# Altium PCB Nutap_Adpt2.PcbDoc
Units mm, origin at the board's own origin, x right, y up, seen from the top; angles counter-clockwise.
Board outline 39.5 x 15 mm, 2 copper layers (Top Layer, Bottom Layer); 24 components, 12 nets, 68 pads, 5 vias.
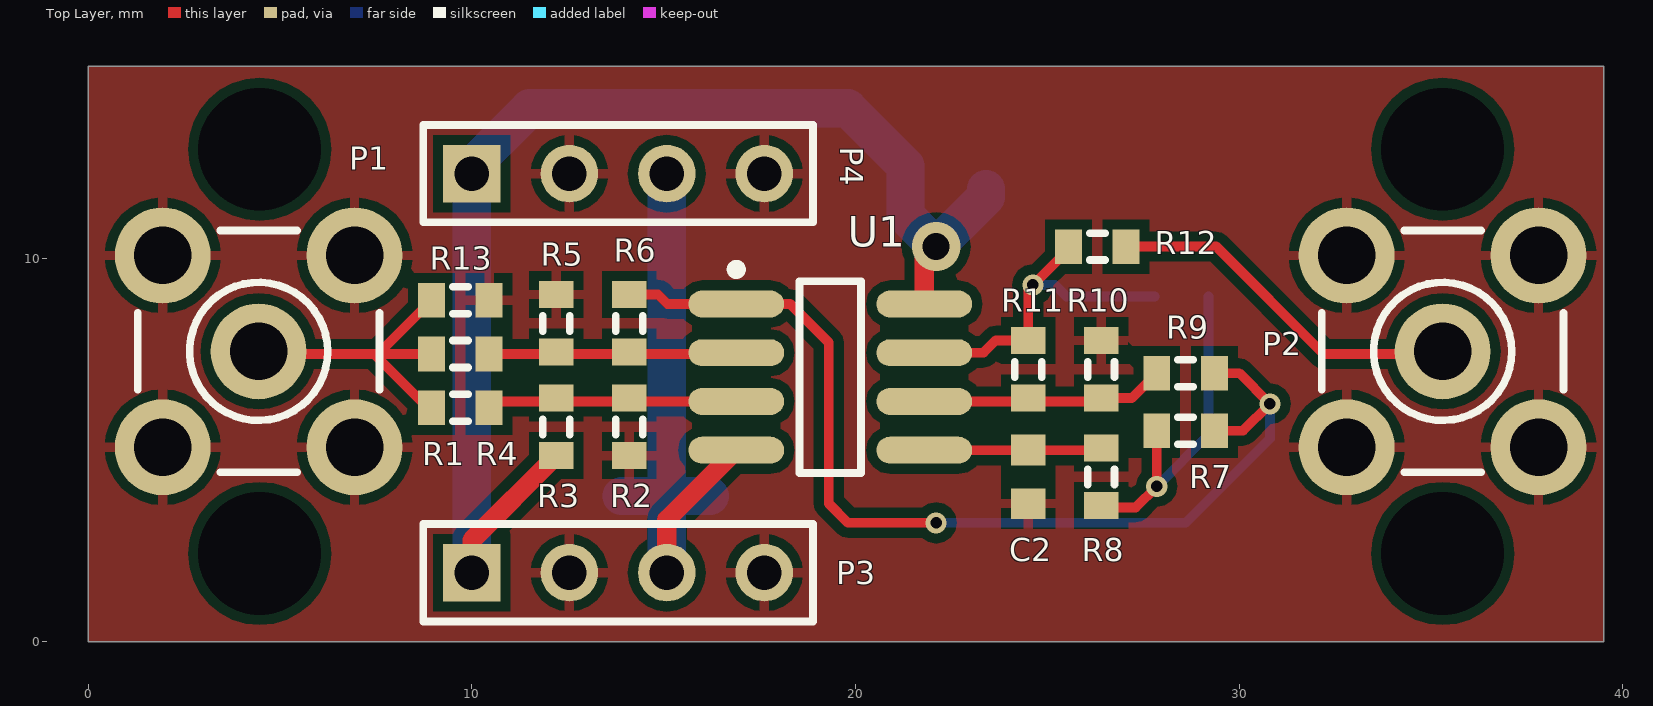
[diagram p0: Top Layer view]
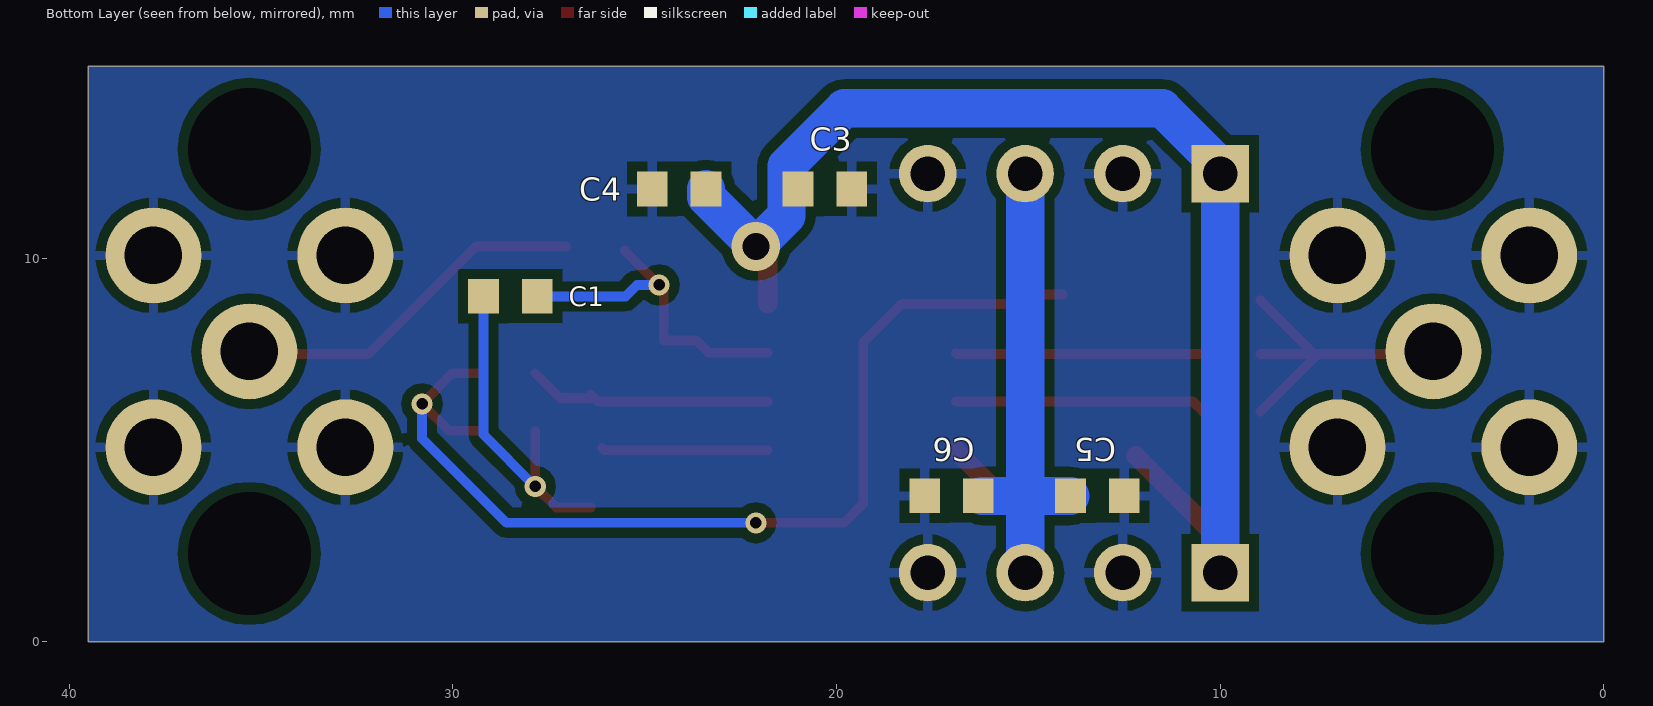
[diagram p1: Bottom Layer view, seen from below]

## Layer stack, top to bottom
Top Layer: signal copper 0.0356
Dielectric: dielectric 0.32, FR-4, Dk 4.8
Bottom Layer: signal copper 0.0356

## Board outline
0,0 0,15 39.5,15 39.5,0

## Design rules (kind name [scope] priority, off if disabled: settings)
Clearance [All] p1: gap=0.254
HoleSize [All] p1: absolutevalues=TRUE maxlimit=3.5 minlimit=0.025 maxpercent=80.000 minpercent=20.000
MinimumSolderMaskSliver MinimumSolderMaskSliver_1 [InComponent('U1')] p1: minsoldermaskwidth=0.05
MinimumSolderMaskSliver [All] p2: minsoldermaskwidth=0.254
PolygonConnect [All] p1: connectstyle=Relief reliefconductorwidth=0.254 reliefentries=4 polygonreliefangle="90 Angle"
RoutingVias [All] p1: holewidth=0.711 width=1.27 viastyle="Through Hole" minholewidth=0.3 minwidth=0.5 maxholewidth=0.711 maxwidth=1.27
SilkscreenOverComponentPads SilkscreenOverComponentPads_1 [All vs (HasFootprint('J1-0603')   OR HasFootprint('POT4MM-2'))] p1: minsilkscreentomaskgap=0.02
SilkscreenOverComponentPads [All] p2: minsilkscreentomaskgap=0.254
SolderMaskExpansion SolderMaskExpansion_1 [InComponent('U1')] p1: expansion=0.05
SolderMaskExpansion [All] p2: expansion=0.102
Width Width_1 [(InNet('-3V') OR InNet('+3V') OR InNet('GND'))] p1: maxlimit=1 minlimit=0.5 preferedwidth=1 toplayer_prefwidth=0.5 bottomlayer_minwidth=1 minimp=50.000000 maximp=50.000000 favimp=50.000000
Width [All] p2: maxlimit=0.254 minlimit=0.254 preferedwidth=0.254
25 further rules are at their usual default settings.

## Components (designator, comment, footprint, x,y, rotation, side; value= is the part's Value field where it differs from the comment)
C1 "Cap" 1608[0603] 28.5,9 r180 bottom
C2 "Cap" 1608[0603] 24.5,4.3 r270 top
C3 "Cap Pol" 1608[0603] 20.3,11.8 r180 bottom
C4 "Cap" 1608[0603] 24.1,11.8 r0 bottom
C5 "Cap Pol" 1608[0603] 13.2,3.8 r0 bottom
C6 "Cap" 1608[0603] 17,3.8 r0 bottom
P1 "SMA" SMB_V-RJ45 4.442,7.568 r0 top
P2 "SMA" SMB_V-RJ45 35.3,7.568 r0 top
P3 "Header 4" HDR1X4 10,1.8 r0 top
P4 "Header 4" HDR1X4 10,12.2 r0 top
R1 "Res3" J1-0603 9.7,6.1 r0 top
R2 "Res3" J1-0603 14.1,5.6 r90 top
R3 "Res3" J1-0603 12.2,5.6 r270 top
R4 "Res3" J1-0603 9.7,7.5 r0 top
R5 "Res3" J1-0603 12.2,8.3 r90 top
R6 "Res3" J1-0603 14.1,8.3 r90 top
R7 "Res3" J1-0603 28.6,5.5 r180 top
R8 "Res3" J1-0603 26.4,4.3 r90 top
R9 "Res3" J1-0603 28.6,7 r180 top
R10 "Res3" J1-0603 26.4,7.1 r270 top
R11 "Res3" J1-0603 24.5,7.1 r90 top
R12 "Res3" J1-0603 26.3,10.3 r0 top
R13 "Res3" J1-0603 9.7,8.9 r0 top
U1 "THS4062" SO-8_M 19.34,6.898 r0 top

## Footprints (in the part's own frame and the unit in brackets; to place one, negate y for a bottom-side part, rotate by r counter-clockwise, add the part's x,y. Pads: shape width x height; smd on the part's side, far side on the other; paste and mask are expansions set on the pad)
1608[0603] [mm] "Chip Capacitor, Body 1.6x0.8mm, IPC High Density"
  rect 0.8x0.9 smd: 1(-0.7,0) 2(0.7,0)
  body extent -0.87,-0.48 0.87,0.48, height 1.3
HDR1X4 [mm] "Connector; Header; 4 Position"
  rect 1.5x1.5 hole 0.9: 1(0,0)
  round 1.5 hole 0.9: 2(2.54,0) 3(5.08,0) 4(7.62,0)
  silkscreen extent -1.27,-1.27 8.89,1.27
J1-0603 [mm] "Chip Resistor, Body 1.6x0.8mm, IPC High Density"
  rect 0.7x0.9 smd: 1(-0.75,0) 2(0.75,0)
  silkscreen extent -0.2,-0.35 0.2,0.35, body extent -0.85,-0.48 0.85,0.48, height 0.9
SMB_V-RJ45 [mm] "Connector; SMB Straight"
  round 2.5 hole 1.5: 1(0,0) 2(-2.5,-2.5) 2(-2.5,2.5) 2(2.5,-2.5) 2(2.5,2.5)
  silkscreen extent -3.15,-3.15 3.15,3.15
SO-8_M [mm] "SOIC, 8-Leads, Body 4.9x3.9mm, Pitch 1.27mm, IPC Low Density"
  oval 2.5x0.7 smd: 1(-2.45,1.905) 2(-2.45,0.635) 3(-2.45,-0.635) 4(-2.45,-1.905) 5(2.45,-1.905) 6(2.45,-0.635) 7(2.45,0.635) 8(2.45,1.905)
  silkscreen extent -2.57,-2.5 0.8,2.93, body extent -2,-2.5 2,2.5, height 1.75

## Part data
C1 C2 C4 C6: library part "Cap Semi", "Capacitor (Semiconductor SIM Model)"
C3 C5: library part "Cap Pol3", "Polarized Capacitor (Surface Mount)"
P1 P2: library part SMB, "SMB Straight Connector"
P3 P4: "Header, 4-Pin"
R1 R2 R3 R4 R5 R6 R7 R8 R9 R10 R11 R12 R13: "Resistor"
U1: library part AD8002AR, "Dual 600MHz, 50mW Current Feedback Amplifier"

## Free pads (board coordinates)
  round 1.524 hole 3.2 unplated paste+0 mask+0.102: T1(4.467,12.837) T1(35.3,12.837) T2(4.467,2.3)
  round 1.524 hole 3.2 unplated: T3(35.3,2.3)

## Via types
v1: diameter 0.55, hole 0.3, Top Layer to Bottom Layer, 4 vias
v2: diameter 1.27, hole 0.7, Top Layer to Bottom Layer, 1 vias

## Nets (pads, with @x,y where several pads share a name; then routed paths per layer and width w, separated by ;. In a path a pad name is that pad's centre, name@x,y a point inside that pad or via, vN(x,y) a via of type N, cw(c..) or ccw(c..) an arc to the next point about the centre after c; other vN are vias at no path point)
+3V: C3.1 C4.1 P3.1 P4.1 R3.2 U1.8 | length 33
  Top Layer w0.5: P3.1 10,2.65 R3.2 ; U1.8 21.79,9.99 v2(22.1,10.3)
  Bottom Layer w1: P3.1 P4.1@10,12 ; P4.1 10,12.4 11.5,13.9 19.8,13.9 21.3,12.4 21.3,11.1 v2(22.1,10.3) 23.4,11.6 C4.1
-3V: C5.2 C6.1 P3.3 P4.3 U1.4 | length 16.6
  Top Layer w0.5: P3.3 15.08,3.183 U1.4
  Bottom Layer w1: C5.2 15.08,3.8 ; P3.3 15.08,3.8 ; P4.3 15.08,3.8 ; C6.1@16.2,3.8 15.08,3.8
GND: C2.2 C3.2 C4.2 C5.1 C6.2 P1.2 P2.2 P3.2 P3.4 P4.2 P4.4 R2.1 R5.2 R10.1 R13.2
NetC1_1: C1.1 R7.2 R8.1 | length 8.6
  Top Layer w0.254: R8.1@26.4,3.5 27.3,3.5 v1(27.85,4.05) R7.2
  Bottom Layer w0.254: v1(27.85,4.05) 29.2,5.4 C1.1
NetC1_2: C1.2 R11.2 R12.1 U1.7 | length 8.9
  Top Layer w0.254: U1.7 23.333,7.533 23.65,7.85 R11.2 24.5,9.181 v1(24.619,9.3) R12.1@25.519,10.2
  Bottom Layer w0.254: v1(24.619,9.3) 25.2,9.3 25.5,9 C1.2
NetC2_1: C2.1 R8.2 U1.5 | length 4.3
  Top Layer w0.254: U1.5 26.043,4.993 R8.2@26.1,5.05
NetP1_1: P1.1 R1.1 R4.1 R13.1 | length 9.4
  Top Layer w0.254: P1.1@4.4,7.5 7.45,7.5 ; 6.8,7.5 7.55,7.5 ; R1.1@8.95,6 7.45,7.5 ; R4.1 7.55,7.5 ; R13.1 7.55,7.5 ; 7.45,7.5 7.55,7.5
NetP2_1: P2.1 R12.2 | length 9.6
  Top Layer w0.254: R12.2 29.4,10.3 32.2,7.5 34.9,7.5 P2.1@35.3,7.1
NetR1_2: R1.2 R2.2 R3.1 U1.3 | length 6.5
  Top Layer w0.254: R1.2@10.45,6 10.713,6.263 U1.3
NetR4_2: R4.2 R5.1 R6.1 U1.2 | length 6.5
  Top Layer w0.254: R4.2 16.857,7.5 U1.2
NetR6_2: R6.2 R7.1 R9.1 U1.1 | length 27
  Top Layer w0.254: R6.2 14.85,9.05 15.097,8.803 U1.1 18.297,8.803 19.3,7.8 19.3,3.6 19.8,3.1 v1(22.1,3.1) ; R7.1 30.1,5.5 v1(30.8,6.2) 30,7 R9.1
  Bottom Layer w0.254: v1(22.1,3.1) 28.6,3.1 30.8,5.3 v1(30.8,6.2)
NetR9_2: R9.2 R10.2 R11.1 U1.6 | length 6.4
  Top Layer w0.254: U1.6 26.213,6.263 R10.2@26.4,6.45 ; R10.2 27.2,6.35 R9.2

## Polygon pours and split planes (outlines as drawn)
GND on Bottom Layer "gnd_bot" (solid, remove dead copper, pour order 5): 0,15 0,0 39.5,0 39.5,15
GND on Top Layer "gnd_top" (solid, remove dead copper, pour order 5): 0,15 0,0 39.5,0 39.5,15

## Silkscreen, mask and mechanical layers (free items; w line width, h text height)
Drill Drawing:
  the board outline again, w0.254